# Altium PCB remap.PcbDoc
Units mm, origin at the board's own origin, x right, y up, seen from the top; angles counter-clockwise.
Board outline 50 x 30 mm, 2 copper layers (Top Layer, Bottom Layer); 3 components, 18 nets, 56 pads, 18 vias.
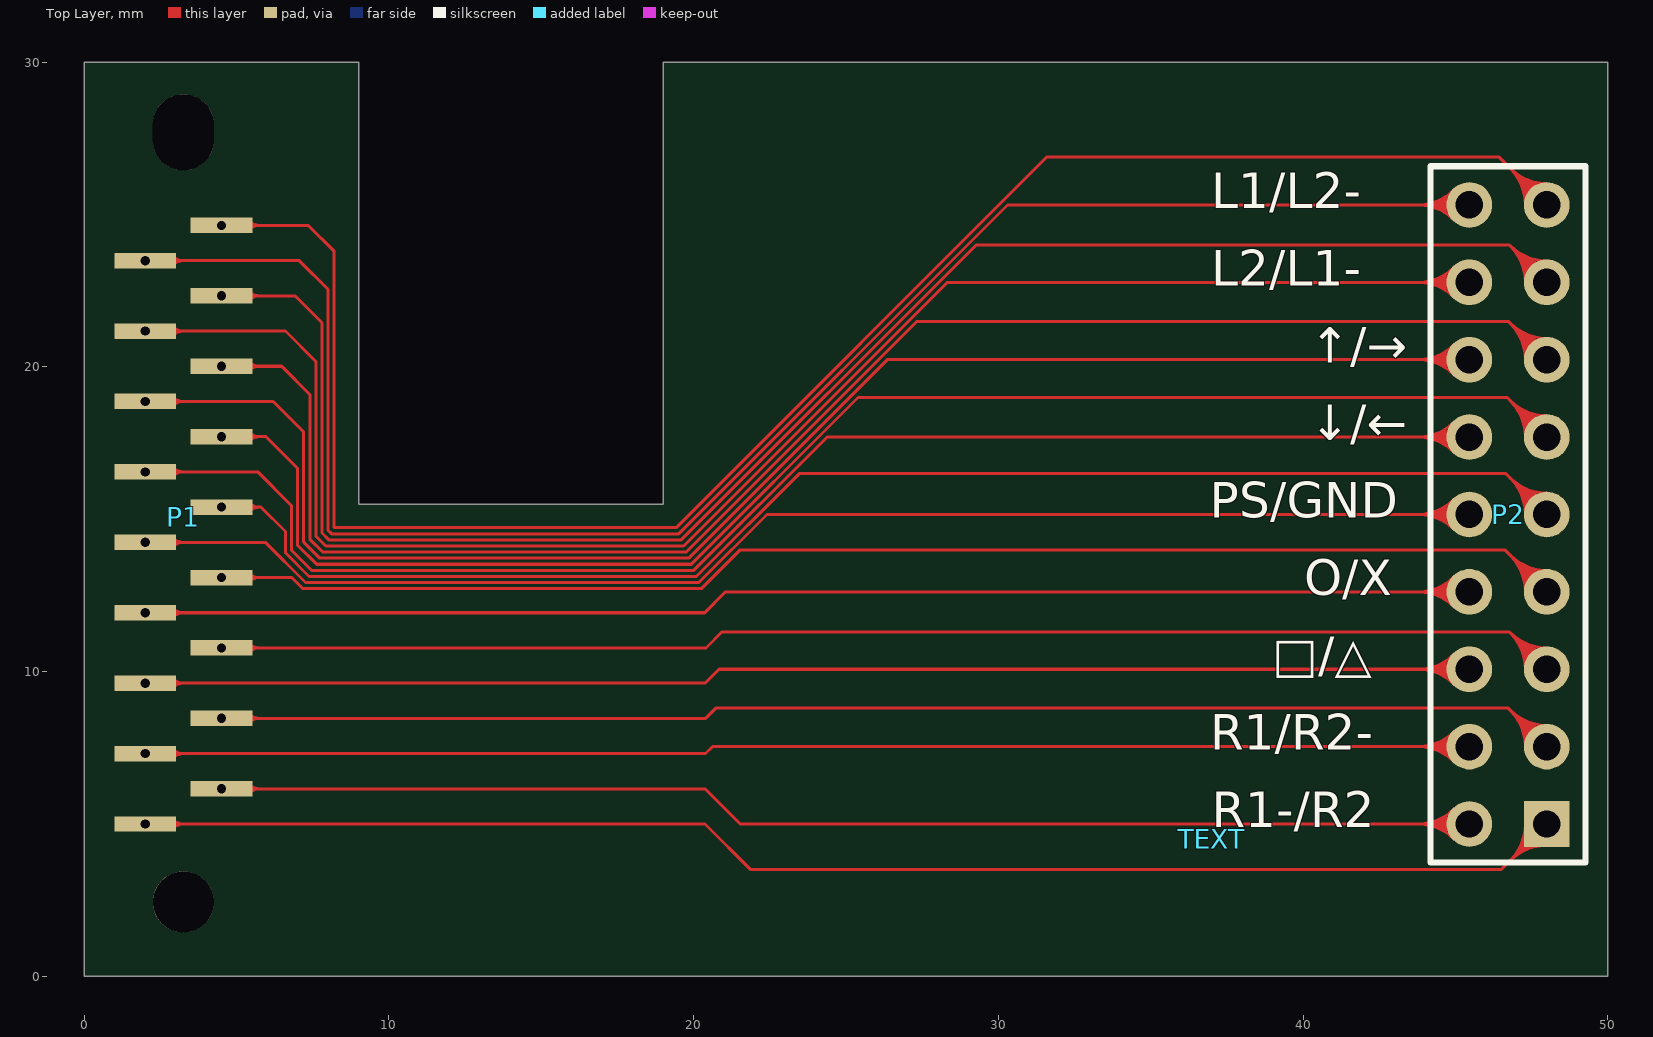
[diagram p0: Top Layer view]
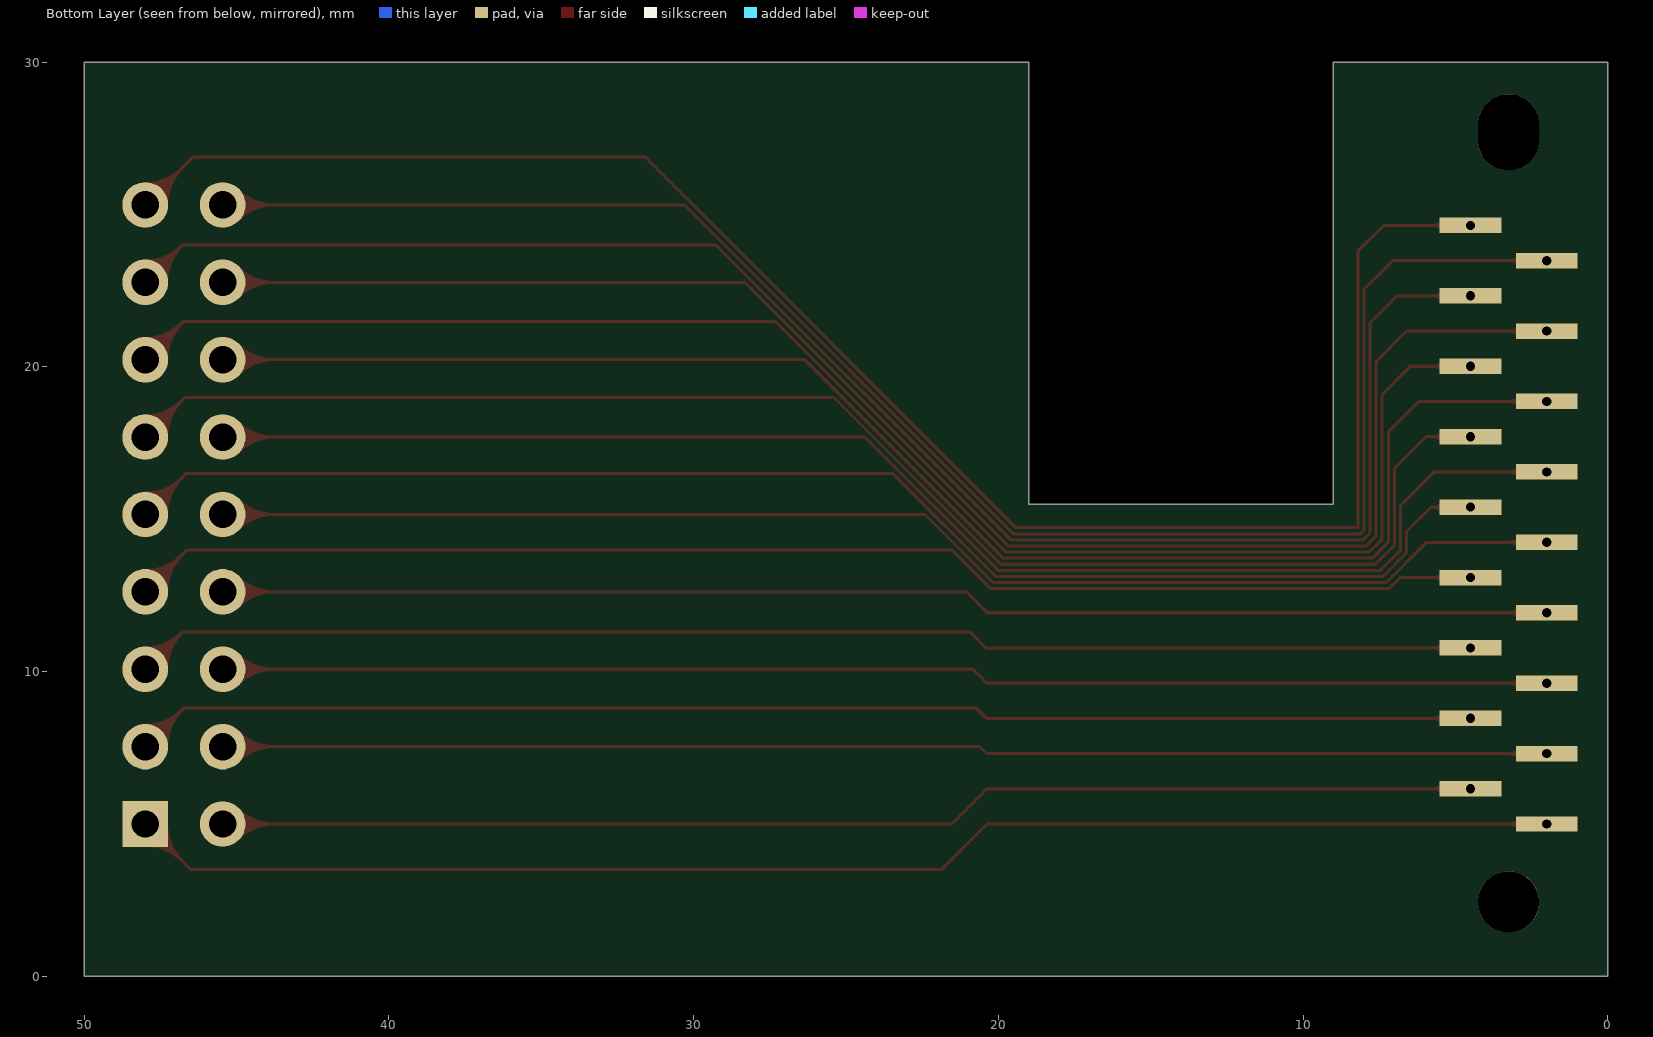
[diagram p1: Bottom Layer view, seen from below]

## Layer stack, top to bottom
Top Layer: signal copper 0.0356
Dielectric: dielectric 0.32, FR-4, Dk 4.8
Bottom Layer: signal copper 0.0356

## Board outline
0,0 0,30 9,30 9,15.5 19,15.5 19,30 50,30 50,0

## Design rules (kind name [scope] priority, off if disabled: settings)
Clearance [All] p1: gap=0.1
PolygonConnect [All] p1: connectstyle=Relief reliefconductorwidth=0.254 reliefentries=4 polygonreliefangle="90 Angle"
RoutingVias [All] p1: holewidth=0.711 width=1.27 viastyle="Through Hole" minholewidth=0.711 minwidth=1.27 maxholewidth=0.711 maxwidth=1.27
SilkscreenOverComponentPads [All] p1: minsilkscreentomaskgap=0.254
SolderMaskExpansion [All] p1: expansion=0.102
TestPointUsage [All] p1: valid=0 allowmultiple=FALSE
Testpoint [All] p1: side=15 testpointundercomponent=TRUE minsize=1.016 maxsize=2.54 preferedsize=1.524 minholesize=0 maxholesize=1.016 preferedholesize=0.813 testpointgrid=0.025 style=1023 order=0-112345678
Width [All] p1: maxlimit=0.254 minlimit=0.1 preferedwidth=0.254
23 further rules are at their usual default settings.

## Components (designator, comment, footprint, x,y, rotation, side; value= is the part's Value field where it differs from the comment)
P1 "REMAP" remap 2,5 r90 top
P2 "Header 9X2" HDR2X9 48,5 r90 top
TEXT "REMAP" text 37,4.5 r0 top

## Footprints (in the part's own frame and the unit in brackets; to place one, negate y for a bottom-side part, rotate by r counter-clockwise, add the part's x,y. Pads: shape width x height; smd on the part's side, far side on the other; paste and mask are expansions set on the pad)
HDR2X9 [mm] "Connector; Header; 9x2 Position"
  rect 1.5x1.5 hole 0.9: 1(0,0)
  round 1.5 hole 0.9: 2(0,2.54) 3(2.54,0) 4(2.54,2.54) 5(5.08,0) 6(5.08,2.54) 7(7.62,0) 8(7.62,2.54) 9(10.16,0) 10(10.16,2.54) 11(12.7,0) 12(12.7,2.54) 13(15.24,0) 14(15.24,2.54) 15(17.78,0) 16(17.78,2.54) 17(20.32,0) 18(20.32,2.54)
  silkscreen extent -1.27,-1.27 21.59,3.81
remap [mil] "角间距91mil 孔离角64mil"
  round 78.74 hole 78.74: 0(-100.73,-49.21)
  oval 98.43x78.74 hole 78.74 slot 98.43 at 0 deg: 1(893.71,-49.21)
  rect 20x80 smd: A1(0,0) A2(45.5,-98.43) A3(91,0) A4(136.5,-98.43) A5(182,0) A6(227.5,-98.43) A7(273,0) A8(318.5,-98.43) A9(364,0) A10(409.5,-98.43) A11(455,0) A12(500.5,-98.43) A13(546,0) A14(591.5,-98.43) A15(637,0) A16(682.5,-98.43) A17(728,0) A18(773.5,-98.43)
  rect 20x80 smd far side: B1(0,0) B2(45.5,-98.43) B3(91,0) B4(136.5,-98.43) B5(182,0) B6(227.5,-98.43) B7(273,0) B8(318.5,-98.43) B9(364,0) B10(409.5,-98.43) B11(455,0) B12(500.5,-98.43) B13(546,0) B14(591.5,-98.43) B15(637,0) B16(682.5,-98.43) B17(728,0) B18(773.5,-98.43)
text [mm] "间距 10mil"

## Part data
P2: "Header, 9-Pin, Dual row"

## Via types
v1: diameter 0.508, hole 0.305, Top Layer to Bottom Layer, 18 vias

## Nets (pads, with @x,y where several pads share a name; then routed paths per layer and width w, separated by ;. In a path a pad name is that pad's centre, name@x,y a point inside that pad or via, vN(x,y) a via of type N, cw(c..) or ccw(c..) an arc to the next point about the centre after c; other vN are vias at no path point)
A1: P1.A1 P2.1 | length 57.1
  Top Layer w0.1: v1(2,5) 20.375,5 21.875,3.5 46.5,3.5 P2.1 ; P1.A1@2.144,4.856 cw(c2.493,4.507) 2.493,5 cw(c2.493,5.493) P1.A1@2.144,5.144 ; P1.A1@2.906,4.856 cw(c3.255,4.507) 3.255,5 cw(c3.255,5.493) P1.A1@2.906,5.144 ; P2.1@47.3,5 cw(c45.61,5) 46.805,3.805 cw(c48,2.61) P2.1@48,4.3 ; P2.1@47.4,5 cw(c45.951,5) 46.976,3.976 cw(c48,2.951) P2.1@48,4.4 ; P2.1@47.5,5 cw(c46.293,5) 47.146,4.146 cw(c48,3.293) P2.1@48,4.5 ; P2.1@47.6,5 cw(c46.634,5) 47.317,4.317 cw(c48,3.634) P2.1@48,4.6
A2: P1.A2 P2.2 | length 51.3
  Top Layer w0.1: v1(4.5,6.156) 20.369,6.156 21.525,5 P2.2 ; P1.A2@4.644,6.011 cw(c4.993,5.663) 4.993,6.156 cw(c4.993,6.648) P1.A2@4.644,6.3 ; P1.A2@5.406,6.011 cw(c5.755,5.663) 5.755,6.156 cw(c5.755,6.648) P1.A2@5.406,6.3 ; P2.2@44.965,4.505 ccw(c43.77,3.31) 43.77,5 ccw(c43.77,6.69) P2.2@44.965,5.495 ; P2.2@45.036,4.576 ccw(c44.011,3.551) 44.011,5 ccw(c44.011,6.449) P2.2@45.036,5.424 ; P2.2@45.106,4.646 ccw(c44.253,3.793) 44.253,5 ccw(c44.253,6.207) P2.2@45.106,5.354 ; P2.2@45.177,4.717 ccw(c44.494,4.034) 44.494,5 ccw(c44.494,5.966) P2.2@45.177,5.283
A3: P1.A3 P2.4 | length 53.4
  Top Layer w0.1: v1(2,7.311) 20.386,7.311 20.615,7.54 P2.4 ; P1.A3@2.144,7.167 cw(c2.493,6.819) 2.493,7.311 cw(c2.493,7.804) P1.A3@2.144,7.456 ; P1.A3@2.906,7.167 cw(c3.255,6.819) 3.255,7.311 cw(c3.255,7.804) P1.A3@2.906,7.456 ; P2.4@44.965,7.045 ccw(c43.77,5.85) 43.77,7.54 ccw(c43.77,9.23) P2.4@44.965,8.035 ; P2.4@45.036,7.116 ccw(c44.011,6.091) 44.011,7.54 ccw(c44.011,8.989) P2.4@45.036,7.964 ; P2.4@45.106,7.186 ccw(c44.253,6.333) 44.253,7.54 ccw(c44.253,8.747) P2.4@45.106,7.894 ; P2.4@45.177,7.257 ccw(c44.494,6.574) 44.494,7.54 ccw(c44.494,8.506) P2.4@45.177,7.823
A4: P1.A4 P2.3 | length 54
  Top Layer w0.1: v1(4.5,8.467) 20.392,8.467 20.725,8.8 46.74,8.8 P2.3 ; P1.A4@4.644,8.323 cw(c4.993,7.975) 4.993,8.467 cw(c4.993,8.96) P1.A4@4.644,8.611 ; P1.A4@5.406,8.323 cw(c5.755,7.975) 5.755,8.467 cw(c5.755,8.96) P1.A4@5.406,8.611 ; P2.3@47.3,7.54 ccw(c45.61,7.54) 46.805,8.735 ccw(c48,9.93) P2.3@48,8.24 ; P2.3@47.4,7.54 ccw(c45.951,7.54) 46.976,8.564 ccw(c48,9.589) P2.3@48,8.14 ; P2.3@47.5,7.54 ccw(c46.293,7.54) 47.146,8.394 ccw(c48,9.247) P2.3@48,8.04 ; P2.3@47.6,7.54 ccw(c46.634,7.54) 47.317,8.223 ccw(c48,8.906) P2.3@48,7.94
A5: P1.A5 P2.6 | length 53.5
  Top Layer w0.1: v1(2,9.623) 20.373,9.623 20.83,10.08 P2.6 ; P1.A5@2.144,9.479 cw(c2.493,9.13) 2.493,9.623 cw(c2.493,10.115) P1.A5@2.144,9.767 ; P1.A5@2.906,9.479 cw(c3.255,9.13) 3.255,9.623 cw(c3.255,10.115) P1.A5@2.906,9.767 ; P2.6@44.965,9.585 ccw(c43.77,8.39) 43.77,10.08 ccw(c43.77,11.77) P2.6@44.965,10.575 ; P2.6@45.036,9.656 ccw(c44.011,8.631) 44.011,10.08 ccw(c44.011,11.529) P2.6@45.036,10.504 ; P2.6@45.106,9.726 ccw(c44.253,8.873) 44.253,10.08 ccw(c44.253,11.287) P2.6@45.106,10.434 ; P2.6@45.177,9.797 ccw(c44.494,9.114) 44.494,10.08 ccw(c44.494,11.046) P2.6@45.177,10.363
A6: P1.A6 P2.5 | length 54.1
  Top Layer w0.1: v1(4.5,10.779) 20.403,10.779 20.925,11.3 46.78,11.3 P2.5 ; P1.A6@4.644,10.634 cw(c4.993,10.286) 4.993,10.779 cw(c4.993,11.271) P1.A6@4.644,10.923 ; P1.A6@5.406,10.634 cw(c5.755,10.286) 5.755,10.779 cw(c5.755,11.271) P1.A6@5.406,10.923 ; P2.5@47.3,10.08 ccw(c45.61,10.08) 46.805,11.275 ccw(c48,12.47) P2.5@48,10.78 ; P2.5@47.4,10.08 ccw(c45.951,10.08) 46.976,11.104 ccw(c48,12.129) P2.5@48,10.68 ; P2.5@47.5,10.08 ccw(c46.293,10.08) 47.146,10.934 ccw(c48,11.787) P2.5@48,10.58 ; P2.5@47.6,10.08 ccw(c46.634,10.08) 47.317,10.763 ccw(c48,11.446) P2.5@48,10.48
A7: P1.A7 P2.8 | length 53.6
  Top Layer w0.1: v1(2,11.934) 20.359,11.934 21.045,12.62 P2.8 ; P1.A7@2.144,11.79 cw(c2.493,11.442) 2.493,11.934 cw(c2.493,12.427) P1.A7@2.144,12.078 ; P1.A7@2.906,11.79 cw(c3.255,11.442) 3.255,11.934 cw(c3.255,12.427) P1.A7@2.906,12.078 ; P2.8@44.965,12.125 ccw(c43.77,10.93) 43.77,12.62 ccw(c43.77,14.31) P2.8@44.965,13.115 ; P2.8@45.036,12.196 ccw(c44.011,11.171) 44.011,12.62 ccw(c44.011,14.069) P2.8@45.036,13.044 ; P2.8@45.106,12.266 ccw(c44.253,11.413) 44.253,12.62 ccw(c44.253,13.827) P2.8@45.106,12.974 ; P2.8@45.177,12.337 ccw(c44.494,11.654) 44.494,12.62 ccw(c44.494,13.586) P2.8@45.177,12.903
A8: P1.A8 P2.7 | length 54.6
  Top Layer w0.1: v1(4.5,13.09) 6.81,13.09 7.175,12.725 20.253,12.725 21.528,14 46.62,14 P2.7 ; P1.A8@4.644,12.946 cw(c4.993,12.597) 4.993,13.09 cw(c4.993,13.582) P1.A8@4.644,13.234 ; P1.A8@5.406,12.946 cw(c5.755,12.597) 5.755,13.09 cw(c5.755,13.582) P1.A8@5.406,13.234 ; P2.7@47.3,12.62 ccw(c45.61,12.62) 46.805,13.815 ccw(c48,15.01) P2.7@48,13.32 ; P2.7@47.4,12.62 ccw(c45.951,12.62) 46.976,13.644 ccw(c48,14.669) P2.7@48,13.22 ; P2.7@47.5,12.62 ccw(c46.293,12.62) 47.146,13.474 ccw(c48,14.327) P2.7@48,13.12 ; P2.7@47.6,12.62 ccw(c46.634,12.62) 47.317,13.303 ccw(c48,13.986) P2.7@48,13.02
A9: P1.A9 P2.10 | length 54.8
  Top Layer w0.1: v1(2,14.246) 5.937,14.246 7.258,12.925 20.171,12.925 22.406,15.16 P2.10 ; P1.A9@2.144,14.101 cw(c2.493,13.753) 2.493,14.246 cw(c2.493,14.738) P1.A9@2.144,14.39 ; P1.A9@2.906,14.101 cw(c3.255,13.753) 3.255,14.246 cw(c3.255,14.738) P1.A9@2.906,14.39 ; P2.10@44.965,14.665 ccw(c43.77,13.47) 43.77,15.16 ccw(c43.77,16.85) P2.10@44.965,15.655 ; P2.10@45.036,14.736 ccw(c44.011,13.711) 44.011,15.16 ccw(c44.011,16.609) P2.10@45.036,15.584 ; P2.10@45.106,14.806 ccw(c44.253,13.953) 44.253,15.16 ccw(c44.253,16.367) P2.10@45.106,15.514 ; P2.10@45.177,14.877 ccw(c44.494,14.194) 44.494,15.16 ccw(c44.494,16.126) P2.10@45.177,15.443
A10: P1.A10 P2.9 | length 56.7
  Top Layer w0.1: v1(4.5,15.401) 5.799,15.401 6.6,14.6 6.6,13.9 7.375,13.125 20.088,13.125 23.463,16.5 46.66,16.5 P2.9 ; P1.A10@4.644,15.257 cw(c4.993,14.909) 4.993,15.401 cw(c4.993,15.894) P1.A10@4.644,15.546 ; P1.A10@5.406,15.257 cw(c5.755,14.909) 5.755,15.401 cw(c5.755,15.894) P1.A10@5.406,15.546 ; P2.9@47.3,15.16 ccw(c45.61,15.16) 46.805,16.355 ccw(c48,17.55) P2.9@48,15.86 ; P2.9@47.4,15.16 ccw(c45.951,15.16) 46.976,16.184 ccw(c48,17.209) P2.9@48,15.76 ; P2.9@47.5,15.16 ccw(c46.293,15.16) 47.146,16.014 ccw(c48,16.867) P2.9@48,15.66 ; P2.9@47.6,15.16 ccw(c46.634,15.16) 47.317,15.843 ccw(c48,16.526) P2.9@48,15.56
A11: P1.A11 P2.12 | length 57.4
  Top Layer w0.1: v1(2,16.557) 5.693,16.557 6.8,15.45 6.8,13.983 7.458,13.325 20.005,13.325 24.38,17.7 P2.12 ; P1.A11@2.144,16.413 cw(c2.493,16.064) 2.493,16.557 cw(c2.493,17.05) P1.A11@2.144,16.701 ; P1.A11@2.906,16.413 cw(c3.255,16.064) 3.255,16.557 cw(c3.255,17.05) P1.A11@2.906,16.701 ; P2.12@44.965,17.205 ccw(c43.77,16.01) 43.77,17.7 ccw(c43.77,19.39) P2.12@44.965,18.195 ; P2.12@45.036,17.276 ccw(c44.011,16.251) 44.011,17.7 ccw(c44.011,19.149) P2.12@45.036,18.124 ; P2.12@45.106,17.346 ccw(c44.253,16.493) 44.253,17.7 ccw(c44.253,18.907) P2.12@45.106,18.054 ; P2.12@45.177,17.417 ccw(c44.494,16.734) 44.494,17.7 ccw(c44.494,18.666) P2.12@45.177,17.983
A12: P1.A12 P2.11 | length 59.4
  Top Layer w0.1: v1(4.5,17.713) 5.963,17.713 7,16.675 7,14.15 7.625,13.525 19.922,13.525 25.397,19 46.7,19 P2.11 ; P1.A12@4.644,17.568 cw(c4.993,17.22) 4.993,17.713 cw(c4.993,18.205) P1.A12@4.644,17.857 ; P1.A12@5.406,17.568 cw(c5.755,17.22) 5.755,17.713 cw(c5.755,18.205) P1.A12@5.406,17.857 ; P2.11@47.3,17.7 ccw(c45.61,17.7) 46.805,18.895 ccw(c48,20.09) P2.11@48,18.4 ; P2.11@47.4,17.7 ccw(c45.951,17.7) 46.976,18.724 ccw(c48,19.749) P2.11@48,18.3 ; P2.11@47.5,17.7 ccw(c46.293,17.7) 47.146,18.554 ccw(c48,19.407) P2.11@48,18.2 ; P2.11@47.6,17.7 ccw(c46.634,17.7) 47.317,18.383 ccw(c48,19.066) P2.11@48,18.1
A13: P1.A13 P2.14 | length 60.3
  Top Layer w0.1: v1(2,18.868) 6.2,18.868 7.2,17.868 7.2,14.25 7.725,13.725 19.839,13.725 26.354,20.24 P2.14 ; P1.A13@2.144,18.724 cw(c2.493,18.376) 2.493,18.868 cw(c2.493,19.361) P1.A13@2.144,19.013 ; P1.A13@2.906,18.724 cw(c3.255,18.376) 3.255,18.868 cw(c3.255,19.361) P1.A13@2.906,19.013 ; P2.14@44.965,19.745 ccw(c43.77,18.55) 43.77,20.24 ccw(c43.77,21.93) P2.14@44.965,20.735 ; P2.14@45.036,19.816 ccw(c44.011,18.791) 44.011,20.24 ccw(c44.011,21.689) P2.14@45.036,20.664 ; P2.14@45.106,19.886 ccw(c44.253,19.033) 44.253,20.24 ccw(c44.253,21.447) P2.14@45.106,20.594 ; P2.14@45.177,19.957 ccw(c44.494,19.274) 44.494,20.24 ccw(c44.494,21.206) P2.14@45.177,20.523
A14: P1.A14 P2.13 | length 62.4
  Top Layer w0.1: v1(4.5,20.024) 6.476,20.024 7.4,19.1 7.4,14.35 7.825,13.925 19.756,13.925 27.331,21.5 46.74,21.5 P2.13 ; P1.A14@4.644,19.88 cw(c4.993,19.532) 4.993,20.024 cw(c4.993,20.517) P1.A14@4.644,20.168 ; P1.A14@5.406,19.88 cw(c5.755,19.532) 5.755,20.024 cw(c5.755,20.517) P1.A14@5.406,20.168 ; P2.13@47.3,20.24 ccw(c45.61,20.24) 46.805,21.435 ccw(c48,22.63) P2.13@48,20.94 ; P2.13@47.4,20.24 ccw(c45.951,20.24) 46.976,21.264 ccw(c48,22.289) P2.13@48,20.84 ; P2.13@47.5,20.24 ccw(c46.293,20.24) 47.146,21.094 ccw(c48,21.947) P2.13@48,20.74 ; P2.13@47.6,20.24 ccw(c46.634,20.24) 47.317,20.923 ccw(c48,21.606) P2.13@48,20.64
A15: P1.A15 P2.16 | length 63.2
  Top Layer w0.1: v1(2,21.18) 6.6,21.18 7.6,20.18 7.6,14.45 7.925,14.125 19.674,14.125 28.329,22.78 P2.16 ; P1.A15@2.144,21.036 cw(c2.493,20.687) 2.493,21.18 cw(c2.493,21.672) P1.A15@2.144,21.324 ; P1.A15@2.906,21.036 cw(c3.255,20.687) 3.255,21.18 cw(c3.255,21.672) P1.A15@2.906,21.324 ; P2.16@44.965,22.285 ccw(c43.77,21.09) 43.77,22.78 ccw(c43.77,24.47) P2.16@44.965,23.275 ; P2.16@45.036,22.356 ccw(c44.011,21.331) 44.011,22.78 ccw(c44.011,24.229) P2.16@45.036,23.204 ; P2.16@45.106,22.426 ccw(c44.253,21.573) 44.253,22.78 ccw(c44.253,23.987) P2.16@45.106,23.134 ; P2.16@45.177,22.497 ccw(c44.494,21.814) 44.494,22.78 ccw(c44.494,23.746) P2.16@45.177,23.063
A16: P1.A16 P2.15 | length 65.3
  Top Layer w0.1: v1(4.5,22.336) 6.915,22.336 7.8,21.45 7.8,14.55 8.025,14.325 19.591,14.325 29.266,24 46.78,24 P2.15 ; P1.A16@4.644,22.191 cw(c4.993,21.843) 4.993,22.336 cw(c4.993,22.828) P1.A16@4.644,22.48 ; P1.A16@5.406,22.191 cw(c5.755,21.843) 5.755,22.336 cw(c5.755,22.828) P1.A16@5.406,22.48 ; P2.15@47.3,22.78 ccw(c45.61,22.78) 46.805,23.975 ccw(c48,25.17) P2.15@48,23.48 ; P2.15@47.4,22.78 ccw(c45.951,22.78) 46.976,23.804 ccw(c48,24.829) P2.15@48,23.38 ; P2.15@47.5,22.78 ccw(c46.293,22.78) 47.146,23.634 ccw(c48,24.487) P2.15@48,23.28 ; P2.15@47.6,22.78 ccw(c46.634,22.78) 47.317,23.463 ccw(c48,24.146) P2.15@48,23.18
A17: P1.A17 P2.18 | length 66.2
  Top Layer w0.1: v1(2,23.491) 7.059,23.491 8,22.55 8,14.642 8.117,14.525 19.508,14.525 30.303,25.32 P2.18 ; P1.A17@2.144,23.347 cw(c2.493,22.999) 2.493,23.491 cw(c2.493,23.984) P1.A17@2.144,23.635 ; P1.A17@2.906,23.347 cw(c3.255,22.999) 3.255,23.491 cw(c3.255,23.984) P1.A17@2.906,23.635 ; P2.18@44.965,24.825 ccw(c43.77,23.63) 43.77,25.32 ccw(c43.77,27.01) P2.18@44.965,25.815 ; P2.18@45.036,24.896 ccw(c44.011,23.871) 44.011,25.32 ccw(c44.011,26.769) P2.18@45.036,25.744 ; P2.18@45.106,24.966 ccw(c44.253,24.113) 44.253,25.32 ccw(c44.253,26.527) P2.18@45.106,25.674 ; P2.18@45.177,25.037 ccw(c44.494,24.354) 44.494,25.32 ccw(c44.494,26.286) P2.18@45.177,25.603
A18: P1.A18 P2.17 | length 68.5
  Top Layer w0.1: v1(4.5,24.647) 7.353,24.647 8.2,23.8 8.2,14.725 19.425,14.725 31.6,26.9 46.42,26.9 P2.17 ; P1.A18@4.644,24.503 cw(c4.993,24.154) 4.993,24.647 cw(c4.993,25.139) P1.A18@4.644,24.791 ; P1.A18@5.406,24.503 cw(c5.755,24.154) 5.755,24.647 cw(c5.755,25.139) P1.A18@5.406,24.791 ; P2.17@47.3,25.32 ccw(c45.61,25.32) 46.805,26.515 ccw(c48,27.71) P2.17@48,26.02 ; P2.17@47.4,25.32 ccw(c45.951,25.32) 46.976,26.344 ccw(c48,27.369) P2.17@48,25.92 ; P2.17@47.5,25.32 ccw(c46.293,25.32) 47.146,26.174 ccw(c48,27.027) P2.17@48,25.82 ; P2.17@47.6,25.32 ccw(c46.634,25.32) 47.317,26.003 ccw(c48,26.686) P2.17@48,25.72
pads on no net: P1.0 P1.1 P1.B1 P1.B2 P1.B3 P1.B4 P1.B5 P1.B6 P1.B7 P1.B8 P1.B9 P1.B10 P1.B11 P1.B12 P1.B13 P1.B14 P1.B15 P1.B16 P1.B17 P1.B18

## Silkscreen, mask and mechanical layers (free items; w line width, h text height)
Mechanical 1:
  the board outline again, w0.254

## Text inside footprints (layer, text, board x,y; h text height)
TEXT: Top Overlay "R1-/R2" at 37,4.5 h2; Top Overlay "L1/L2-" at 36.983,24.82 h2; Top Overlay "L2/L1-" at 36.983,22.28 h2; Top Overlay "↑/→" at 40.218,19.74 h2; Top Overlay "↓/←" at 40.218,17.2 h2; Top Overlay "PS/GND" at 36.939,14.664 h2; Top Overlay "O/X" at 40.046,12.12 h2; Top Overlay "□/△" at 38.998,9.58 h2; Top Overlay "R1/R2-" at 36.948,7.04 h2